# Altium PCB PCB.PSU.DCDC.001.A1.PcbDoc
Units mm, origin at the board's own origin, x right, y up, seen from the top; angles counter-clockwise.
Board outline 90 x 110 mm, 2 copper layers (Top Layer, Bottom Layer), stack 0.428 mm thick; 63 components, 19 nets, 150 pads, 21 vias.
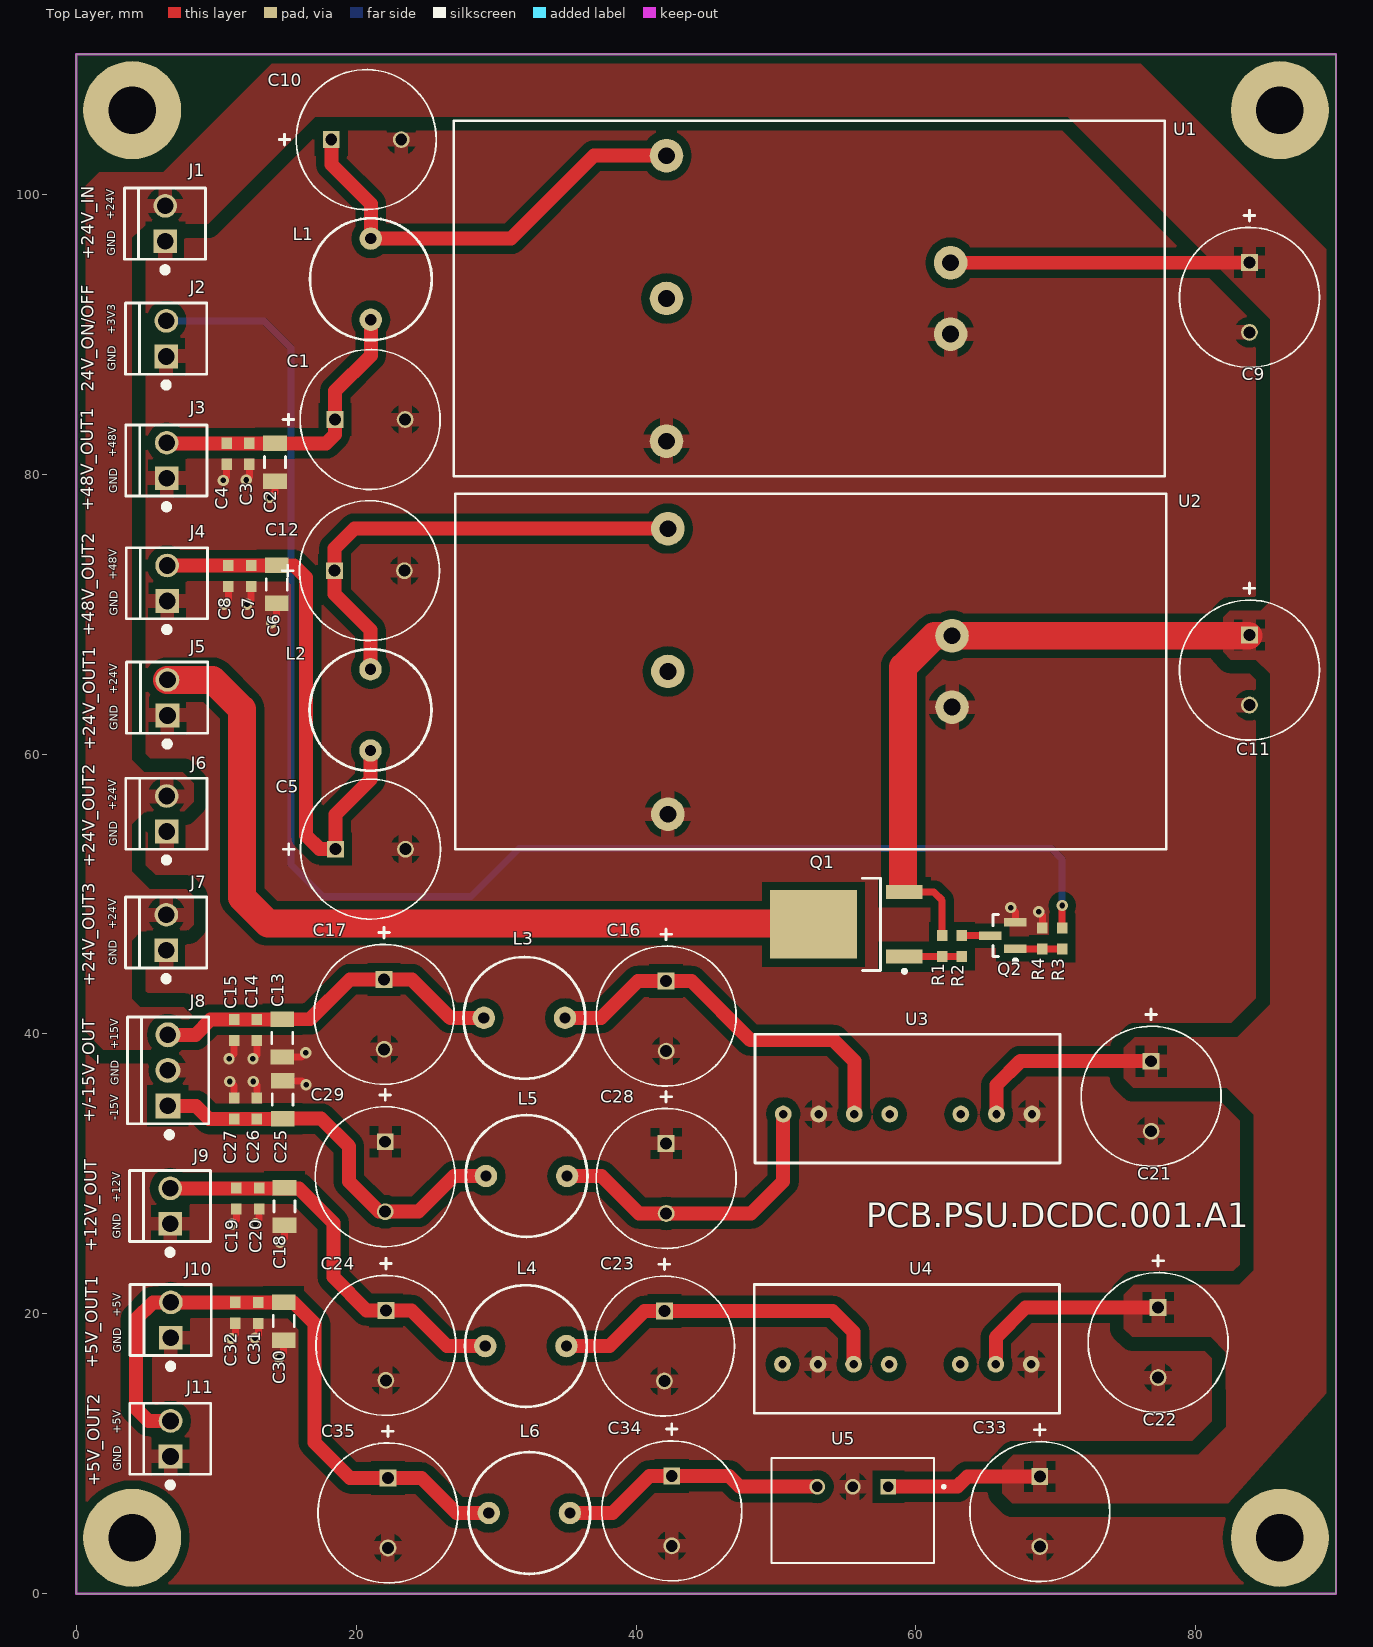
[diagram p0: Top Layer view]
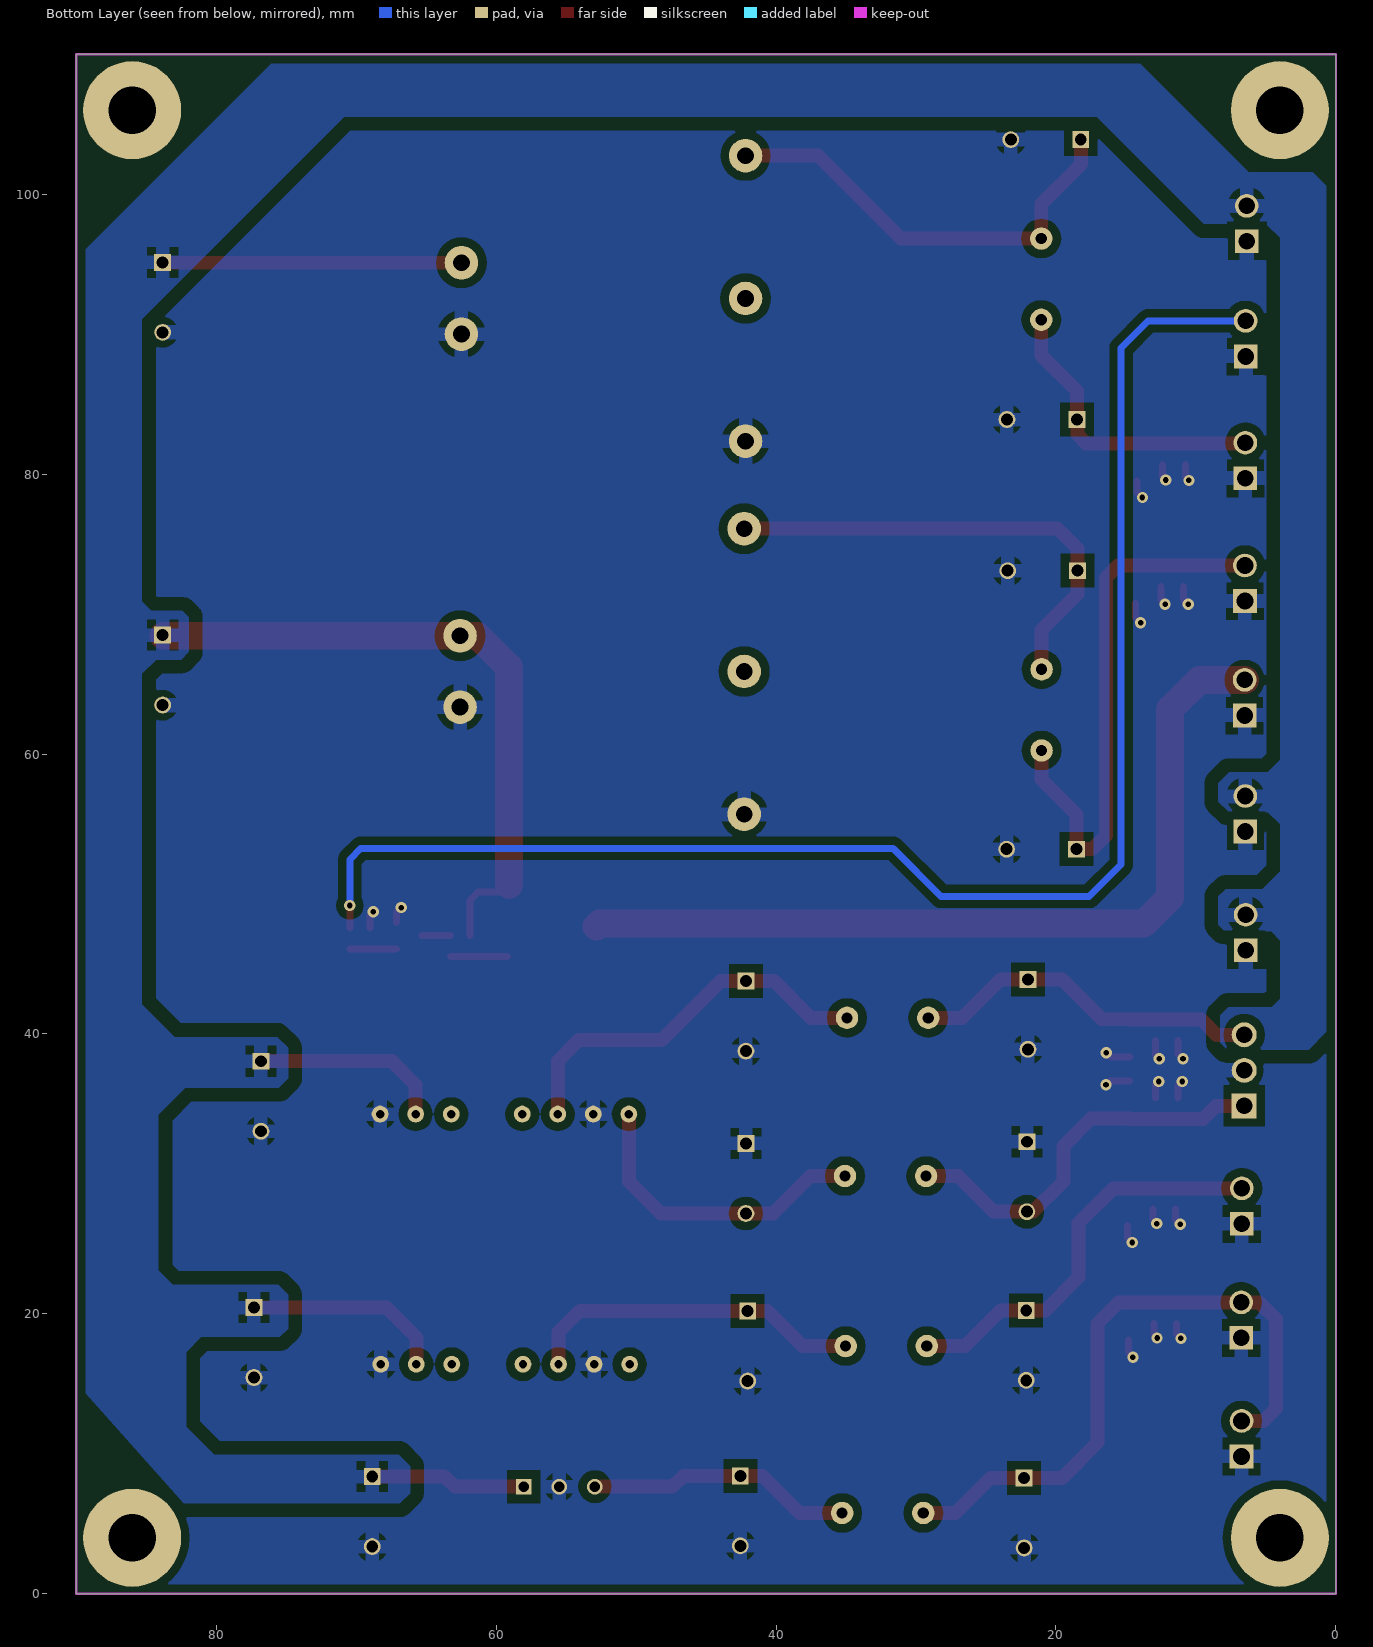
[diagram p1: Bottom Layer view, seen from below]
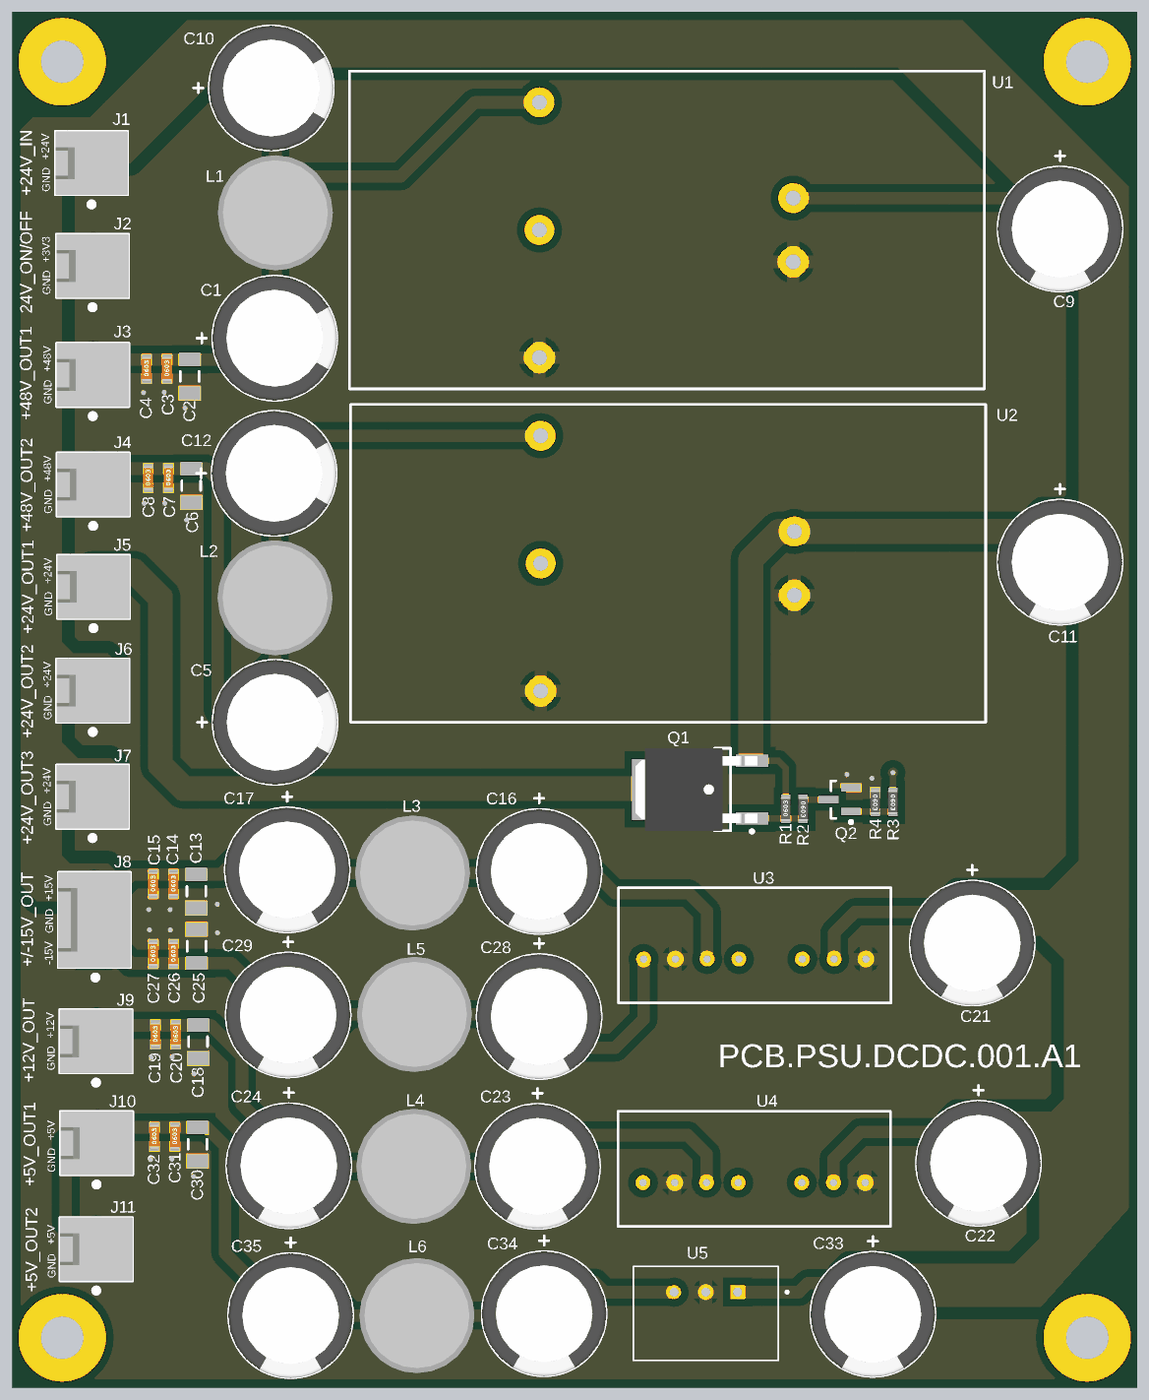
[diagram p2: 3D render of the assembled board from above, using the file's embedded part models]

## Layer stack, top to bottom
Top Solder: solder mask 0.0102, Solder Resist, Dk 3.5
Top Layer: signal copper 0.07
Dielectric1: core 0.288, FR-4, Dk 4.8
Bottom Layer: signal copper 0.07
Bottom Solder: solder mask 0.0102, Solder Resist, Dk 3.5

## Board outline
0,0 90,0 90,110 0,110

## Design rules (kind name [scope] priority, off if disabled: settings)
Clearance Clearance_1 [All] p1: gap=0.6 ignorepadtopadclearanceinfootprint=TRUE except(0.4: Arc-Arc Arc-Track Arc-SMDPad Arc-THPad Arc-Via Arc-Hole Track-Track Track-SMDPad Track-THPad Track-Via Track-Hole SMDPad-SMDPad SMDPad-THPad SMDPad-Via SMDPad-Hole THPad-THPad THPad-Via THPad-Hole Via-Via Via-Hole Fill-Hole Poly-Hole Region-Hole Text-Hole; 1: Fill-Fill Fill-Poly Fill-Region Poly-Poly Poly-Region Region-Region)
ComponentClearance [All] p1: gap=0.25 collisioncheckmode=3 verticalgap=0 showdistances=FALSE
DiffPairsRouting DiffPairsRouting_USB [InDifferentialPair('USB')] p1: maxlimit=10 minlimit=0.1 mostfreqgap=0.1 toplayer_minwidth=0.16 toplayer_maxwidth=0.5 toplayer_prefwidth=0.2 bottomlayer_minwidth=0.16 bottomlayer_maxwidth=0.5 bottomlayer_prefwidth=0.2 maxuncoupledlength=12.7
DiffPairsRouting DiffPairsRouting_USB_D [InDifferentialPair('USB_D')] p2: maxlimit=10 minlimit=0.1 mostfreqgap=0.1 toplayer_minwidth=0.16 toplayer_maxwidth=0.5 toplayer_prefwidth=0.2 bottomlayer_minwidth=0.16 bottomlayer_maxwidth=0.5 bottomlayer_prefwidth=0.2 maxuncoupledlength=12.7
DiffPairsRouting DiffPairsRouting_ETH_RD [InDifferentialPair('ETH_RD')] p3: maxlimit=10 minlimit=0.1 mostfreqgap=0.1 toplayer_minwidth=0.16 toplayer_maxwidth=0.5 toplayer_prefwidth=0.2 bottomlayer_minwidth=0.16 bottomlayer_maxwidth=0.5 bottomlayer_prefwidth=0.2 maxuncoupledlength=12.7
DiffPairsRouting DiffPairsRouting_ETH_TD [InDifferentialPair('ETH_TD')] p4: maxlimit=10 minlimit=0.1 mostfreqgap=0.1 toplayer_minwidth=0.16 toplayer_maxwidth=0.5 toplayer_prefwidth=0.2 bottomlayer_minwidth=0.16 bottomlayer_maxwidth=0.5 bottomlayer_prefwidth=0.2 maxuncoupledlength=12.7
DiffPairsRouting [All] p5: maxlimit=0.16 minlimit=0.1 mostfreqgap=0.1 toplayer_minwidth=0.16 toplayer_maxwidth=0.5 toplayer_prefwidth=0.2 bottomlayer_minwidth=0.16 bottomlayer_maxwidth=0.5 bottomlayer_prefwidth=0.2 maxuncoupledlength=12.7
Height [All] p1: minheight=0 maxheight=20 prefheight=10
HoleSize HoleSize_BGA [isVia And WithinRoom('MCU_IO')] p1: absolutevalues=TRUE maxlimit=2.5 minlimit=0.1 maxpercent=80.000 minpercent=20.000
HoleSize [All] p2: absolutevalues=TRUE maxlimit=15 minlimit=0.2 maxpercent=80.000 minpercent=20.000
HoleToHoleClearance [All] p1: gap=0.4 allowstackedmicrovias=TRUE
MatchedLengths MD_MatchedLengths [InNetClass('MD')] p1: tolerance=2 checknetsindiffpair=FALSE checkdiffpairvsdiffpair=TRUE checkxsignals=TRUE checkothers=TRUE
MatchedLengths SD_MatchedLengths [InNetClass('SD')] p2: tolerance=8 checknetsindiffpair=FALSE checkdiffpairvsdiffpair=TRUE checkxsignals=TRUE checkothers=TRUE
MatchedLengths SSD_MatchedLengths [InNetClass('SSD')] p3: tolerance=10 checknetsindiffpair=FALSE checkdiffpairvsdiffpair=TRUE checkxsignals=TRUE checkothers=TRUE
MatchedLengths XIP_MatchedLengths [InNetClass('XIP')] p4: tolerance=10 checknetsindiffpair=FALSE checkdiffpairvsdiffpair=TRUE checkxsignals=TRUE checkothers=TRUE
MatchedLengths Flash [InNetClass('Flash')] p5: tolerance=1.27 checknetsindiffpair=FALSE checkdiffpairvsdiffpair=TRUE checkxsignals=TRUE checkothers=TRUE
MatchedLengths DiffPair_ETHMatchedLengths [InDifferentialPairClass('DP_ETH')] p6: tolerance=2.3 checknetsindiffpair=TRUE checkdiffpairvsdiffpair=FALSE checkxsignals=FALSE checkothers=FALSE
MatchedLengths RMII_MatchedLengths [InNetClass('RMII')] p7: tolerance=8 checknetsindiffpair=FALSE checkdiffpairvsdiffpair=TRUE checkxsignals=TRUE checkothers=TRUE
MatchedLengths DiffPair_DP_USBMatchedLengths [InDifferentialPair ('USB_D')] p8: tolerance=14.2 checknetsindiffpair=TRUE checkdiffpairvsdiffpair=FALSE checkxsignals=FALSE checkothers=FALSE
MinimumAnnularRing "MinimumAnnularRing Mid-Layer 1" [OnLayer('Mid-Layer 1')] p1: minimumring=0.35
MinimumAnnularRing "MinimumAnnularRing Mid-Layer 2" [OnLayer('Mid-Layer 2')] p2: minimumring=0.35
MinimumAnnularRing [All] p3: minimumring=0.1
MinimumSolderMaskSliver [All] p1: minsoldermaskwidth=0
NetAntennae NetAntennae_JTAG [InNetClass('JTAG')] p1: netantennaetolerance=20
NetAntennae [All] p2: netantennaetolerance=0
PlaneClearance [All] p1: clearance=0.5
PlaneConnect [All] p1: planeconnectstyle=Relief reliefexpansion=0.5 reliefentries=4 reliefconductorwidth=1 reliefairgap=0.5
PolygonConnect [All] p1: thpad.connectstyle=Relief thpad.reliefconductorwidth=1 thpad.reliefentries=4 thpad.polygonreliefangle="90 Angle" thpad.airgapwidth=0.5 smdpad.connectstyle=Direct smdpad.reliefconductorwidth=0.4 smdpad.reliefentries=4 smdpad.polygonreliefangle="90 Angle" smdpad.airgapwidth=0.254 via.connectstyle=Direct via.reliefconductorwidth=0.75 via.reliefentries=4 via.polygonreliefangle="90 Angle" via.airgapwidth=0.5
RoomDefinition PCB.PSU.DCDC.001.A1 [InComponentClass('PCB.PSU.DCDC.001.A1')] p1: confinementstyle=ConfineIn formatcopy=TRUE lockcomponents=FALSE outline -829.291,-613.638 -778.491,-613.638 -778.491,-588.238 -829.291,-588.238
RoutingCorners [All] p1: cornerstyle=45-Degree minsetback=2 maxsetback=2
RoutingVias [All] p1: holewidth=0.3 width=0.8 viastyle="Through Hole" minholewidth=0.25 minwidth=0.48 maxholewidth=0.3 maxwidth=0.8
SilkToSilkClearance [All] p1: silktosilkclearance=0.25
SilkToSolderMaskClearance SilkscreenOverComponentPads [IsPad] p1: minsilkscreentomaskgap=0.25 clearancetoexposedcopper=TRUE
SolderMaskExpansion ISVIA [IsVia] p1: expansion=0.15
SolderMaskExpansion [All] p2: expansion=0.065
Width Width_BGA [WithinRoom('BGA')] p1: maxlimit=1 minlimit=0.1 preferedwidth=0.15 minimp=50.000000 maximp=50.000000 favimp=50.000000
Width [All] p2: maxlimit=5 minlimit=0.1 preferedwidth=0.15 minimp=50.000000 maximp=50.000000 favimp=50.000000
18 further rules are at their usual default settings.

## Components (designator, comment, footprint, x,y, rotation, side; value= is the part's Value field where it differs from the comment)
C1 "100uF/80V" CAP_EEU-FS1K101B 21,83.9 r0 top
C2 "10u" C1206 14.2,80.85 r90 top
C3 "1.0u" C0603 12.375,81.45 r90 top
C4 "100n" C0603 10.75,81.45 r90 top
C5 "100uF/80V" CAP_EEU-FS1K101B 21.025,53.2 r0 top
C6 "10u" C1206 14.325,72.125 r90 top
C7 "1.0u" C0603 12.5,72.725 r90 top
C8 "100n" C0603 10.875,72.725 r90 top
C9 "220uF/50V" CAP_ESL227M050AH8AA 83.825,92.625 r270 top
C10 "100uF/80V" CAP_EEU-FS1K101B 20.725,103.9 r0 top
C11 "220uF/50V" CAP_ESL227M050AH8AA 83.825,66 r270 top
C12 "100uF/80V" CAP_EEU-FS1K101B 20.95,73.1 r0 top
C13 "10u" C1206 14.725,39.7 r90 top
C14 "1.0u" C0603 12.9,40.275 r90 top
C15 "100n" C0603 11.275,40.275 r90 top
C16 "220uF/50V" CAP_ESL227M050AH8AA 42.15,41.275 r270 top
C17 "220uF/50V" CAP_ESL227M050AH8AA 22,41.4 r270 top
C18 "10u" C1206 14.875,27.675 r90 top
C19 "1.0u" C0603 11.45,28.25 r90 top
C20 "100n" C0603 13.075,28.25 r90 top
C21 "220uF/50V" CAP_ESL227M050AH8AA 76.8,35.55 r270 top
C22 "220uF/50V" CAP_ESL227M050AH8AA 77.3,17.95 r270 top
C23 "220uF/50V" CAP_ESL227M050AH8AA 42.025,17.7 r270 top
C24 "220uF/50V" CAP_ESL227M050AH8AA 22.125,17.75 r270 top
C25 "10u" C1206 14.75,35.3 r90 top
C26 "1.0u" C0603 12.9,34.675 r90 top
C27 "100n" C0603 11.275,34.675 r90 top
C28 "220uF/50V" CAP_ESL227M050AH8AA 42.15,29.675 r270 top
C29 "220uF/50V" CAP_ESL227M050AH8AA 22.075,29.8 r270 top
C30 "10u" C1206 14.825,19.475 r90 top
C31 "1.0u" C0603 13.011,20.07 r90 top
C32 "100n" C0603 11.375,20.075 r90 top
C33 "220uF/50V" CAP_ESL227M050AH8AA 68.85,5.875 r270 top
C34 "220uF/50V" CAP_ESL227M050AH8AA 42.55,5.925 r270 top
C35 "220uF/50V" CAP_ESL227M050AH8AA 22.275,5.775 r270 top
J1 "22-27-2021" MOLEX_22-27-2021 6.345,97.895 r90 top
J2 "22-27-2021" MOLEX_22-27-2021 6.425,89.675 r90 top
J3 "22-27-2021" MOLEX_22-27-2021 6.445,80.97 r90 top
J4 "22-27-2021" MOLEX_22-27-2021 6.475,72.2 r90 top
J5 "22-27-2021" MOLEX_22-27-2021 6.5,64.025 r90 top
J6 "22-27-2021" MOLEX_22-27-2021 6.445,55.73 r90 top
J7 "22-27-2021" MOLEX_22-27-2021 6.425,47.25 r90 top
J8 "22-27-2031" MOLEX_22-27-2031 6.55,37.4 r90 top
J9 "22-27-2021" MOLEX_22-27-2021 6.7,27.7 r90 top
J10 "22-27-2021" MOLEX_22-27-2021 6.745,19.555 r90 top
J11 "22-27-2021" MOLEX_22-27-2021 6.72,11.08 r90 top
L1 "0.96A/47uH" IND_RLB0912 21.05,93.925 r270 top
L2 "0.96A/47uH" IND_RLB0912 21.025,63.15 r270 top
L3 "0.96A/47uH" IND_RLB0912 32.025,41.15 r180 top
L4 "0.96A/47uH" IND_RLB0912 32.125,17.7 r180 top
L5 "0.96A/47uH" IND_RLB0912 32.175,29.85 r0 top
L6 "0.96A/47uH" IND_RLB0912 32.375,5.775 r180 top
Q1 "SUD50P08-25L-BE3" TO-252-3 55.025,47.825 r180 top
Q2 "2N7002-7-F" SOT23-3N 66.2,47.025 r180 top
R1 "10k" R0603 61.875,46.275 r90 top
R2 "10k" R0603 63.275,46.275 r270 top
R3 "150" R0603 70.45,46.825 r270 top
R4 "10k" R0603 69.025,46.825 r270 top
U1 "DKE10B-24" DKE10B-24 52.375,92.55 r180 top
U2 "DKE10B-24" DKE10B-24 52.475,65.9 r180 top
U3 "DPBW03F-15" DPBW03F-15 59.4,35.375 r180 top
U4 "SPBW03F-12" SPBW03F-12 59.35,17.5 r180 top
U5 "TSR 1-2450E" CONV_TSR_1-2450E 55.485,5.95 r180 top

## Footprints (in the part's own frame and the unit in brackets; to place one, negate y for a bottom-side part, rotate by r counter-clockwise, add the part's x,y. Pads: shape width x height; smd on the part's side, far side on the other; paste and mask are expansions set on the pad)
C0603 [mm] "CAPACITOR SMD 0603"
  rect 0.8x0.75 smd: 1(-0.75,0) 2(0.75,0)
  body extent -1,-0.39 1,0.39, height 0.79
C1206 [mm] "Chip Capacitor, Body 3.2x1.6mm, IPC High Density"
  rect 1.1x1.7 smd: 1(-1.35,0) 2(1.35,0)
  silkscreen extent -0.4,-0.75 0.4,0.75, body extent -1.7,-0.9 1.7,0.9, height 1.3
CAP_EEU-FS1K101B [mm]
  rect 1.2x1.2 hole 0.85: 1(-2.5,0)
  round 1.2 hole 0.85: 2(2.5,0)
  silkscreen extent -6.22,-5 5,5, body extent -5,-5 5,5, height 12.5
CAP_ESL227M050AH8AA [mm]
  rect 1.2x1.2 hole 0.85: 1(-2.5,0)
  round 1.2 hole 0.85: 2(2.5,0)
  silkscreen extent -6.22,-5 5,5, body extent -5,-5 5,5, height 12.5
CONV_TSR_1-2450E [mm]
  rect 1.13x1.13 hole 0.73: 1(-2.54,-1.7)
  round 1.13 hole 0.73: 2(0,-1.7) 3(2.54,-1.7)
  silkscreen extent -6.6,-3.75 5.8,3.75, body extent -5.8,-3.75 5.8,3.75, height 10.2
DKE10B-24 [mm] "CONN USB MICRO B RECPT SMT R/A"
  round 2.4 hole 1.2: 1(-10.1,-2.55) 2(-10.1,2.55) 3(10.2,-10.2) 4(10.2,0) 5(10.2,10.2)
  silkscreen extent -25.4,-12.7 25.4,12.7, body extent -25.4,-12.7 25.4,12.7, height 11.4
DPBW03F-15 [mm] "CONN USB MICRO B RECPT SMT R/A"
  round 1.2 hole 0.6: 1(-8.89,1.1) 2(-6.35,1.1) 3(-3.81,1.1) 5(1.27,1.1) 6(3.81,1.1) 7(6.35,1.1) 8(8.89,1.1)
  silkscreen extent -10.9,-4.6 10.9,4.6, body extent -10.9,-4.6 10.9,4.6, height 11.1
IND_RLB0912 [mm]
  round 1.6 hole 0.8: 1(-2.9,0) 2(2.9,0)
  silkscreen extent -4.35,-4.35 4.35,4.35, body extent -4.6,-4.6 4.6,4.6, height 11
MOLEX_22-27-2021 [mm]
  rect 1.69x1.69 / inner round 1.69 / far side rect 1.69x1.69 hole 1.19: 1(-1.27,-0.02)
  round 1.69 hole 1.19: 2(1.27,-0.02)
  silkscreen extent -3.5,-2.9 2.54,2.9, body extent -2.54,-2.92 2.54,2.88, height 12.12
MOLEX_22-27-2031 [mm]
  rect 1.785x1.785 hole 1.19: 1(-2.54,0)
  round 1.785 hole 1.19: 2(0,0) 3(2.54,0)
  silkscreen extent -4.8,-2.92 3.81,2.88, body extent -3.81,-2.92 3.81,2.88, height 12.12
R0603 [mm] "RESISTOR SMD 0603"
  rect 0.8x0.75 smd: 1(-0.75,0) 2(0.75,0)
  body extent -1,-0.39 1,0.39, height 0.79
SOT23-3N [mm] "SOT23, 3-Leads, Body 3.0x2.6mm (max), Pitch 0.95mm, IPC Medium Density"
  rect 1.6x0.6 smd: 1(-0.9,0.95) 2(-0.9,-0.95) 3(0.9,0)
  silkscreen extent -1.03,-1.5 0.7,1.92, body extent -1.47,-1.5 1.47,1.5, height 1.1
SPBW03F-12 [mm] "CONN USB MICRO B RECPT SMT R/A"
  round 1.2 hole 0.6: 1(-8.89,1.1) 2(-6.35,1.1) 3(-3.81,1.1) 5(1.27,1.1) 6(3.81,1.1) 7(6.35,1.1) 8(8.89,1.1)
  silkscreen extent -10.9,-4.6 10.9,4.6, body extent -10.9,-4.6 10.9,4.6, height 11.1
TO-252-3 [mm] "D-PAK, 3-Pads, Body 6.20x6.66mm (max), IPC Medium Density"
  rect 2.6x1 smd: 1(-4.15,2.3) 3(-4.15,-2.3)
  rect 6.2x4.9 smd: 2(2.35,0)
  silkscreen extent -4.28,-3.3 -1.15,3.47, body extent -4.57,-3.3 5.15,3.3, height 2.63

## Part data
C1 C5 C10 C12: library part Cap_Electrolytic, "CAP ALUM 220UF 20% 50V SMD", MFR=KEMET, MPN=EEU-FS1K101B, Price=0.68
C2 C6 C13 C18 C25 C30: library part CAP_YAG_CC1206KKX7R8BB106, "Capacitor 10u 1206 +-10% 25V", MFR=Yageo, MPN=CC1206KKX7R8BB106, Tolerance=+-10%, Voltage (V)=50, Category=Capacitor, Price=0.44, Type=X7R
C3 C7 C14 C19 C26 C31: library part CAP_YAG_CC0603KRX7R9BB105_X7R, "Capacitor 1.0u 0603 +-10% 50V", MFR=Yageo, MPN=CC0603KRX7R9BB105, Package / Case=0603, Tolerance=+-10%, Voltage (V)=50, Capacitor (Farad)=1.0u, Category=Capacitor, Part Number=CAP_YAG_CC0603KRX7R9BB105_X7R, Price=0.1, Thickness (mm)=0.8, Type=X7R
C4 C8 C15 C20 C27 C32: library part CAP_YAG_CC0603KRX7R9BB104_X7R, "Capacitor 100n 0603 +-10% 50V", MFR=Yageo, MPN=CC0603KRX7R9BB104, Package / Case=0603, Tolerance=+-10%, Voltage (V)=50, Capacitor (Farad)=100n, Part Number=CAP_YAG_CC0603KRX7R9BB104_X7R, Price=0.1, Thickness (mm)=0.8, Type=X7R
C9 C11 C16 C17 C21 C22 C23 C24 C28 C29 C33 C34 C35: library part Cap_Electrolytic, "CAP ALUM 220UF 20% 50V SMD", MFR=KEMET, MPN=ESL227M050AH8AA, Price=0.68
J1 J2 J3 J4 J5 J6 J7 J9 J10 J11: "Connector Wire to Board Header 2 Position 2.54mm Solder Straight Thru-Hole Ba", MFR=Molex, Package=None, Availability=Unavailable, MPN=22-27-2021, Price=0.3
J8: "Connector Header Through Hole 3 position 0.100 _2.54mm_", MFR=Molex, Package="TQFP-144 Molex", Availability=Unavailable, MPN=22-27-2031, Price=0.43, SnapEDA_Link=https://www.snapeda.com/parts/22-27-2031/Molex/view-part/523256/?ref=snap
L1 L2 L3 L4 L5 L6: library part Inductor, "Power Inductors - Leaded 47uH 10% .96A", MFR=Bourns, MPN=RLB0912-470KL, Supplier Part Number=652-RLB0912-470KL, Price=0.49, Supplier=Mouser
Q1: "MOSFET 80V P-CH MOSFET (D-S) 17", MFR=Vishay, MPN=SUD50P08-25L-BE3, Price=2.74
Q2: library part MOSFET-N, "MOSFET N-CH 60V 200MA SOT23-3", MFR="Diodes Incorporated", MPN=2N7002-7-F, Price=0.2
R1 R2 R4: library part RES_YAG_RC0603FR-0710KL, "Resistor 10k 0603 +-1% 0.1", MFR=Yageo, MPN=RC0603FR-0710KL, Operating Temperature="-55°C to +155°C", Package / Case=0603, Power (Watts)=0.1, Temperature Coefficient=+-200ppm°C, Tolerance=+-1%, Voltage (V)=75, Category=Resistor, Part Number=RES_YAG_RC0603FR-0710KL, Price=0.1, Resistor (Ohms)=10k, Thickness (mm)=0.45
R3: library part RES_YAG_RC0603FR-07150RL, "Resistor 150 0603 +-1% 0.1", MFR=Yageo, MPN=RC0603FR-07150RL, Operating Temperature="-55°C to +155°C", Package / Case=0603, Power (Watts)=0.1, Temperature Coefficient=+-200ppm°C, Tolerance=+-1%, Voltage (V)=75, Category=Resistor, Part Number=RES_YAG_RC0603FR-07150RL, Price=0.1, Resistor (Ohms)=150, Thickness (mm)=0.45
U1 U2: "Isolated DC/DC Converters - Through Hole 18-36Vin +/-24Vout 21-210mA, 10W", MFR="MEAN WELL", MPN=DKE10B-24, Price=22.3
U3: "Isolated DC/DC Converters - Through Hole 9-36Vin +/-15Vout +/-100mA SIP Reg Iso", MFR="MEAN WELL", MPN=DPBW03F-15, Price=10.8
U4: "Isolated DC/DC Converters - Through Hole 9-36Vin 12Vout 250mA SIP8 Reg Iso", MFR="MEAN WELL", MPN=SPBW03F-12, Price=10.8
U5: library part TSR_1-2450E, "1 Amp POL converter, industrial, 6-36 VDC input, pos.-pos. circuit, cost efficient, LM78 compatible, SIP-3", MFR="Traco Power", Package="SIP-3 Traco Power", Availability="In Stock", Check_prices=https://www.snapeda.com/parts/TSR%201-2450E/Traco%20Power/view-part/4817566/?ref=eda, MPN="TSR 1-2450E", Price=3.92, Purchase-URL="https://pricing.snapeda.com/search/part/TSR 1-2450E/?ref=eda", SnapEDA_Link=https://www.snapeda.com/parts/TSR%201-2450E/Traco%20Power/view-part/4817566/?ref=snap

## Free pads (board coordinates)
  round 7 hole 3.4: 0(4,4) 0(4,106) 0(86,4) 0(86,106)

## Via types
v1: diameter 0.8, hole 0.4, Top Layer to Bottom Layer, tented both sides, 21 vias

## Nets (pads, with @x,y where several pads share a name; then routed paths per layer and width w, separated by ;. In a path a pad name is that pad's centre, name@x,y a point inside that pad or via, vN(x,y) a via of type N, cw(c..) or ccw(c..) an arc to the next point about the centre after c; other vN are vias at no path point)
24V_On/Off: J2.2 R3.1 | length 109.4
  Top Layer w0.5: R3.1 v1(70.45,49.175)
  Bottom Layer w0.5: J2.2@6.375,90.94 13.41,90.94 15.35,89 15.35,52.1 17.625,49.825 28.2,49.825 31.625,53.25 69.675,53.25 70.45,52.475 v1(70.45,49.175)
+5V_OUT: C30.2 C31.2 C32.2 C35.1 J10.2 J11.2 L6.2 | length 46.2
  Top Layer w1: J10.2@6.725,20.825 C30.2 15.525,20.825 17.025,19.325 17.025,10.8 19.55,8.275 C35.1 24.675,8.275 27.175,5.775 L6.2 ; J11.2 5.175,12.35 4.275,13.25 4.275,19.625 5.475,20.825 J10.2
+12V_OUT: C18.2 C19.2 C20.2 C24.1 J9.2 L4.2 | length 29.5
  Top Layer w1: J9.2@6.68,28.97 J9.2 15.905,28.97 18.375,26.5 18.375,22.625 20.75,20.25 C24.1 23.95,20.25 26.5,17.7 L4.2
+15V_OUT: C13.2 C14.2 C15.2 C17.1 J8.3 L3.2 | length 25.4
  Top Layer w1: J8.3 8.515,39.94 9.6,41.025 C15.2 C13.2@14.75,41.025 ; C13.2 16.7,41.05 19.55,43.9 C17.1 23.975,43.9 26.725,41.15 L3.2
+24V_IN: C9.1 C11.1 C21.1 C22.1 C33.1 J1.2 J6.2 J7.2 Q1.3 R1.2 U1.1 U2.1 U3.2 U4.2 U5.1 | length 107.2
  Top Layer w0.5: Q1.3@59.475,50.125 61.3,50.125 61.875,49.55 R1.2
  Top Layer w1: U5.1 62.95,7.65 63.675,8.375 C33.1 ; U1.1 83.8,95.1 C9.1 ; U4.2 65.7,18.325 67.825,20.45 C22.1 ; U3.2 65.75,36.35 67.45,38.05 C21.1 ; C11.1@83.775,68.45 C11.1
  Top Layer w2: 59.075,50.631 59.075,66.2 61.325,68.45 U2.1 C11.1@83.775,68.45
+24V_OUT_1: J5.2 Q1.2 | length 61.5
  Top Layer w2: J5.2@6.48,65.295 J5.2 9.755,65.295 11.85,63.2 11.85,49.75 13.7,47.9 52.6,47.9 Q1.2@52.825,47.675
+48V_OUT_1: C1.1 C2.2 C3.2 C4.2 J3.2 L1.2 | length 21.6
  Top Layer w1: J3.2@6.425,82.24 6.465,82.2 C4.2 C2.2 17.85,82.2 18.475,82.825 18.475,83.875 C1.1 18.5,85.925 21.05,88.475 L1.2
+48V_OUT_2: C5.1 C6.2 C7.2 C8.2 J4.2 L2.2 | length 39.3
  Top Layer w1: J4.2@6.455,73.47 J4.2 C6.2@14.32,73.47 ; C6.2 15.55,73.475 16.425,72.6 16.425,54.175 17.4,53.2 C5.1 18.525,55.675 21.025,58.175 L2.2
-15V_OUT: C25.1 C26.1 C27.1 C29.2 J8.1 L5.1 | length 28.4
  Top Layer w1: J8.1 8.565,34.86 9.5,33.925 C26.1 C25.1@14.775,33.925 ; C25.1 17.5,33.95 19.475,31.975 19.475,29.45 21.625,27.3 C29.2 24.45,27.3 27,29.85 L5.1
GND: C1.2 C2.1 C3.1 C4.1 C5.2 C6.1 C7.1 C8.1 C9.2 C10.2 C11.2 C12.2 C13.1 C14.1 C15.1 C16.2 C17.2 C18.1 C19.1 C20.1 C21.2 C22.2 C23.2 C24.2 C25.2 C26.2 C27.2 C28.1 C29.1 C30.1 C31.1 C32.1 C33.2 C34.2 C35.2 J1.1 J2.1 J3.1 J4.1 J5.1 J6.1 J7.1 J8.2 J9.1 J10.1 J11.1 Q2.2 R4.1 U1.2 U1.5 U2.2 U2.5 U3.1 U3.7 U4.1 U4.7 U5.2 | length 27.1
  Top Layer w0.5: v1(10.5,79.55) 10.75,79.8 C4.1 ; v1(10.55,70.7) 10.875,71.025 C8.1 ; v1(10.925,38.225) 11.275,38.575 C15.1 ; v1(10.975,36.6) 11.275,36.3 C27.2 ; v1(11.075,18.25) 11.375,18.55 C32.1 ; v1(11.125,26.4) 11.45,26.725 C19.1 ; v1(12.15,79.575) 12.375,79.8 C3.1 ; v1(12.2,70.7) 12.5,71 C7.1 ; v1(12.625,38.225) 12.9,38.5 C14.1 ; v1(12.65,36.6) 12.9,36.35 C26.2 ; v1(12.775,18.275) 13.011,18.511 C31.1 ; v1(12.8,26.45) 13.075,26.725 C20.1 ; v1(13.825,78.325) 14.2,78.7 C2.1 ; v1(13.95,69.375) 14.325,69.75 C6.1 ; v1(14.5,16.9) 14.825,17.225 C30.1 ; v1(14.55,25.1) 14.875,25.425 C18.1 ; C13.1 16.1,38.35 v1(16.4,38.65) ; C25.2 16.15,36.65 v1(16.425,36.375) ; v1(66.775,49.025) 67.1,48.7 Q2.2 ; v1(68.775,48.725) 69.025,48.475 R4.1
NetC10_1: C10.1 L1.1 U1.3 | length 31.8
  Top Layer w1: C10.1 18.225,102.125 21.05,99.3 L1.1 31.075,96.825 37,102.75 U1.3
NetC12_1: C12.1 L2.1 U2.3 | length 34.1
  Top Layer w1: L2.1 21.025,68.85 18.45,71.425 C12.1 18.45,74.675 19.875,76.1 U2.3
NetC16_1: C16.1 L3.1 U3.6 | length 27.9
  Top Layer w1: L3.1 37.5,41.15 40.125,43.775 C16.1 43.95,43.775 48.175,39.55 54.1,39.55 55.59,38.06 U3.6
NetC23_1: C23.1 L4.1 U4.6 | length 24.5
  Top Layer w1: L4.1 38.1,17.7 40.6,20.2 C23.1 54.05,20.2 55.54,18.71 U4.6
NetC28_2: C28.2 L5.2 U3.8 | length 22.3
  Top Layer w1: L5.2 37.525,29.85 40.2,27.175 C28.2 48.225,27.175 50.51,29.46 U3.8
NetC34_1: C34.1 L6.1 U5.3 | length 19.1
  Top Layer w1: L6.1 38.325,5.775 40.975,8.425 C34.1 46.625,8.425 47.4,7.65 U5.3
NetQ1_1: Q1.1 R1.1 R2.2 | length 4.1
  Top Layer w0.5: Q1.1 R1.1 R2.2
NetQ2_1: Q2.1 R3.2 R4.2 | length 3.3
  Top Layer w0.5: Q2.1 R3.2
NetQ2_3: Q2.3 R2.1 | length 2
  Top Layer w0.5: R2.1 Q2.3
pads on no net: U1.4 U2.4 U3.3 U3.5 U4.3 U4.5 U4.8

## Polygon pours and split planes (outlines as drawn)
+24V_IN on Bottom Layer "Top Layer-No Net" (solid, remove dead copper, pour order 6): 85.3,42.125 82.949,39.775 75.625,39.775 74.85,39 74.85,36.825 75.525,36.15 82.2,36.15 84.125,34.225 84.126,23.101 83.1,22.075 75.575,22.075 74.85,21.35 74.85,18.95 75.45,18.35 81.05,18.35 82.15,17.25 82.15,11.925 80.15,9.925 66.95,9.925 66.15,9.125 66.15,7.2 66.875,6.475 82.314,6.475 90,15.098 90,95.375 75.375,110 14.65,110 6.225,101.575 1.65,101.575 0.525,100.45 0.525,40.3 1.95,38.875 7.775,38.875 8.275,39.375 8.275,41.35 7.7,41.925 4.575,41.925 3.975,42.525 3.975,46.675 4.625,47.325 7.925,47.325 8.4,47.8 8.4,49.825 7.875,50.35 5.25,50.35 3.975,51.625 3.975,54.975 4.85,55.85 7.65,55.85 8.4,56.6 8.4,57.925 7.625,58.7 4.875,58.7 3.975,59.6 3.975,96.869 5.036,97.875 9.425,97.875 17.075,105.525 70.851,105.525 84,92.375 85.3,91.075 85.3,70.9 84.625,70.225 82.409,70.225 81.95,69.778 81.95,67.3 82.5,66.75 84.275,66.75 85.3,65.725
GND on Bottom Layer "Top Layer-No Net" (solid, remove dead copper, pour order 8): 0.05,109.95 90.05,109.95 90.05,-0.05 0.05,-0.05
+24V_IN on Top Layer "Top Layer-No Net" (solid, remove dead copper, pour order 0): 85.3,42.125 82.949,39.775 75.625,39.775 74.85,39 74.85,36.825 75.525,36.15 82.2,36.15 84.125,34.225 84.126,23.101 83.1,22.075 75.575,22.075 74.85,21.35 74.85,18.95 75.45,18.35 81.05,18.35 82.15,17.25 82.15,11.925 80.15,9.925 66.95,9.925 66.15,9.125 66.15,7.2 66.875,6.475 82.314,6.475 90,15.098 90,95.375 75.375,110 14.65,110 6.225,101.575 1.65,101.575 0.525,100.45 0.525,40.3 1.95,38.875 7.775,38.875 8.275,39.375 8.275,41.35 7.7,41.925 4.575,41.925 3.975,42.525 3.975,46.675 4.625,47.325 7.925,47.325 8.4,47.8 8.4,49.825 7.875,50.35 5.25,50.35 3.975,51.625 3.975,54.975 4.85,55.85 7.65,55.85 8.4,56.6 8.4,57.925 7.625,58.7 4.875,58.7 3.975,59.6 3.975,96.869 5.036,97.875 9.425,97.875 17.075,105.525 70.851,105.525 84,92.375 85.3,91.075 85.3,70.9 84.625,70.225 82.409,70.225 81.95,69.778 81.95,67.3 82.5,66.75 84.275,66.75 85.3,65.725
GND on Top Layer "Top Layer-No Net" (solid, remove dead copper, pour order 2): -0.02,109.99 89.98,109.99 89.98,-0.01 -0.02,-0.01

## Keep-outs
Keep-Out Layer:
  the board outline again, w0.152

## Silkscreen, mask and mechanical layers (free items; w line width, h text height)
Top Overlay:
  text "+24V" at 2.95,98.175 h1 r90
  text "GND" at 3,95.6 h1 r90
  text "+24V_IN" at 1.575,95.3 h1.52 r90
  text "+3V3" at 3,89.95 h1 r90
  text "GND" at 3.05,87.375 h1 r90
  text "24V_ON/OFF" at 1.575,85.875 h1.52 r90
  text "+48V" at 3.09,81.21 h1 r90
  text "GND" at 3.14,78.635 h1 r90
  text "+48V_OUT1" at 1.55,77.35 h1.52 r90
  text "+48V" at 3.12,72.44 h1 r90
  text "GND" at 3.17,69.865 h1 r90
  text "+48V_OUT2" at 1.6,68.425 h1.52 r90
  text "+24V" at 3.145,64.265 h1 r90
  text "GND" at 3.195,61.69 h1 r90
  text "+24V_OUT1" at 1.7,60.275 h1.52 r90
  text "+24V" at 3.09,55.97 h1 r90
  text "GND" at 3.14,53.395 h1 r90
  text "+24V_OUT2" at 1.65,51.925 h1.52 r90
  text "+24V" at 3.07,47.49 h1 r90
  text "GND" at 3.12,44.915 h1 r90
  text "+24V_OUT3" at 1.65,43.425 h1.52 r90
  text "+15V" at 3.215,38.91 h1 r90
  text "GND" at 3.265,36.335 h1 r90
  text "-15V" at 3.215,33.83 h1 r90
  text "+/-15V_OUT" at 1.65,33.65 h1.52 r90
  text "+12V" at 3.345,27.94 h1 r90
  text "PCB.PSU.DCDC.001.A1" at 56.45,25.625 h3
  text "GND" at 3.395,25.365 h1 r90
  text "+12V_OUT" at 1.775,24.425 h1.52 r90
  text "+5V" at 3.39,19.795 h1 r90
  text "GND" at 3.44,17.22 h1 r90
  text "+5V_OUT1" at 1.85,16.1 h1.52 r90
  text "+5V" at 3.4,11.45 h1 r90
  text "GND" at 3.45,8.775 h1 r90
  text "+5V_OUT2" at 2,7.675 h1.52 r90

## Dimensions
-0.02,-0.01 to 89.98,-0.01 on Mechanical 5
-0.02,-0.01 to -0.02,109.99 on Mechanical 5